# Altium PCB nRF2460.PcbDoc
Units mil, origin at the board's own origin, x right, y up, seen from the top; angles counter-clockwise.
Board outline 583 x 792 mil, 2 copper layers (Top Layer, Bottom Layer); 21 components, 23 nets, 78 pads, 49 vias.
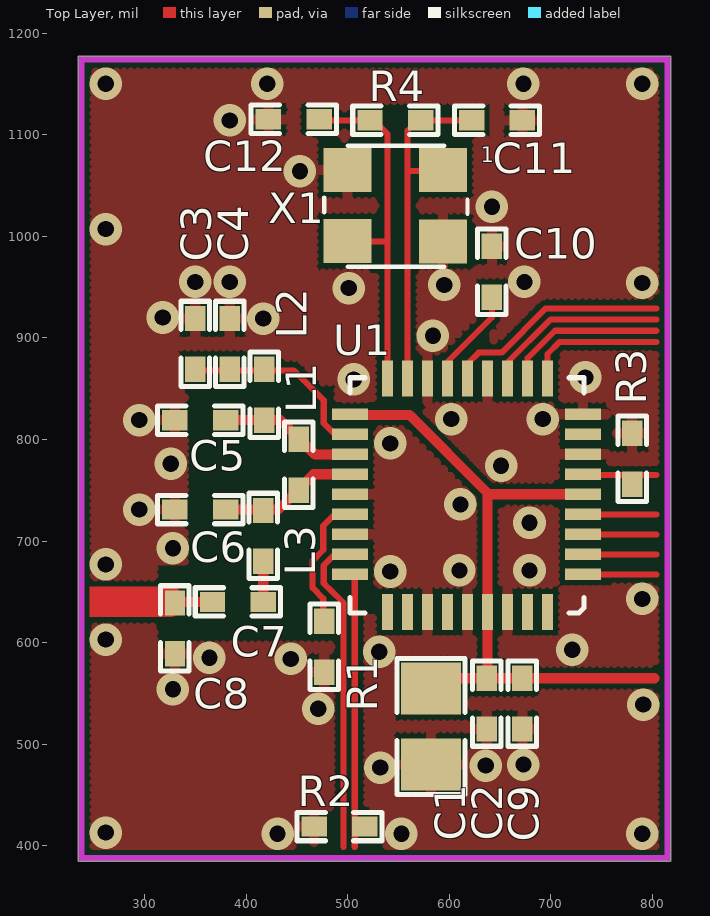
[diagram p0: Top Layer view]
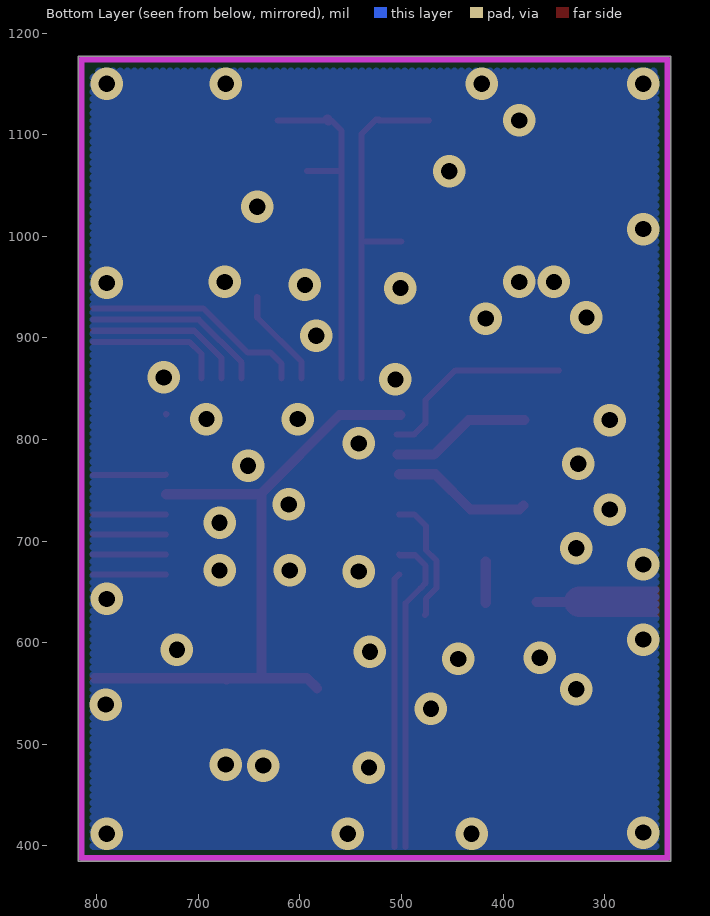
[diagram p1: Bottom Layer view, seen from below]

## Layer stack, top to bottom
Top Layer: signal copper 1.4
Dielectric: dielectric 12.6, FR-4, Dk 4.8
Bottom Layer: signal copper 1.4

## Board outline
818,1177 818,385 235,385 235,1177

## Design rules (kind name [scope] priority, off if disabled: settings)
Clearance [All] p1: gap=5
ComponentClearance [All] p1 off: gap=10 collisioncheckmode=3 verticalgap=10 showdistances=FALSE
FabricationTestPointUsage TestPointUsage [All] p1: valid=0 allowmultiple=FALSE
FabricationTestpoint Testpoint [All] p1: side=3 testpointundercomponent=TRUE minsize=40 maxsize=100 preferedsize=60 minholesize=0 maxholesize=40 preferedholesize=32 testpointgrid=1 allowsidetop=TRUE allowsidebottom=TRUE usegrid=TRUE gridtolerance=0.01
Height [All] p1 off: minheight=0 maxheight=1000 prefheight=500
HoleSize [All] p1: absolutevalues=TRUE maxlimit=200 minlimit=1 maxpercent=80.000 minpercent=20.000
PolygonConnect PolygonConnect_1 [isVia and innet(gnd)] p1: connectstyle=Direct reliefconductorwidth=10 reliefentries=4 polygonreliefangle="90 Angle"
PolygonConnect [All] p2: connectstyle=Relief reliefconductorwidth=10 reliefentries=4 polygonreliefangle="90 Angle"
RoutingVias [All] p1: holewidth=16 width=32 viastyle="Through Hole" minholewidth=10 minwidth=10 maxholewidth=28 maxwidth=50
SilkscreenOverComponentPads [All] p1: minsilkscreentomaskgap=10
SolderMaskExpansion [All] p1: expansion=4
Width [All] p1: maxlimit=100 minlimit=1 preferedwidth=6 minimp=50.000000 maximp=50.000000 favimp=50.000000
22 further rules are at their usual default settings.

## Components (designator, comment, footprint, x,y, rotation, side; value= is the part's Value field where it differs from the comment)
C1 "4.7µF" 0805 582,555 r270 top
C2 "1.0nF" 0402s 637,565 r270 top
C3 "2.2nF" 0402s 350,919 r270 top
C4 "N.C." 0402s 384,919 r270 top
C5 "1.2pF" 0402s 330,819 r0 top
C6 "1.2pF" 0402s 380,731 r180 top
C7 "1.5pF" 0402s 367,640 r0 top
C8 "1.2pF" 0402s 330,589 r90 top
C9 "10nF" 0402s 672,565 r270 top
C10 "33nF" 0402s 642,990 r270 top
C11 "15pF" 0402s 672,1114 r180 top
C12 "15pF" 0402s 422,1115 r0 top
L1 "4.7nH" 0402s 452,750 r90 top
L2 "8.2nH" 0402s 418,819 r90 top
L3 "5.6nH" 0402s 417,730 r270 top
R1 "22k" 0402s 477,571 r90 top
R2 "22k" 0402s 517,419 r180 top
R3 "22k" 0402s 780,756 r90 top
R4 "1M0" 0402s 522,1114 r0 top
U1 "nRF2460" Nordic_QFN36 617,745 r180 top
X1 "16MHz" BT-XTAL_3225 547,1030 r180 top

## Footprints (in the part's own frame and the unit in brackets; to place one, negate y for a bottom-side part, rotate by r counter-clockwise, add the part's x,y. Pads: shape width x height; smd on the part's side, far side on the other; paste and mask are expansions set on the pad)
0402s [mil] "SMD 0402s footprint"
  rect 25x20 smd: 1(0,0) 2(50,0)
  silkscreen extent -17,-14 67,14
0805 [mm] "SMD 0805 footprint"
  rect 1.3x1.5 smd: 1(0,0) 2(1.9,0)
  silkscreen extent -0.75,-0.85 2.65,0.85
BT-XTAL_3225 [mm] "Mercury X32 series"
  rect 1.2x1.1 smd: 1(-1.194,-0.89) 2(1.194,-0.89) 3(1.194,0.888) 4(-1.194,0.891)
  silkscreen extent -1.8,-1.5 1.78,1.52
Nordic_QFN36 [mm]
  rect 0.9x0.28 smd: 1(-2.916,1.975) 2(-2.916,1.475) 3(-2.916,0.975) 4(-2.916,0.475) 5(-2.916,-0.025) 6(-2.916,-0.525) 7(-2.916,-1.025) 8(-2.916,-1.525) 9(-2.916,-2.025) 19(2.916,-2.025) 20(2.916,-1.525) 21(2.916,-1.025) 22(2.916,-0.525) 23(2.916,-0.025) 24(2.916,0.475) 25(2.916,0.975) 26(2.916,1.475) 27(2.916,1.975)
  rect 0.28x0.9 smd: 10(-2.025,-2.916) 11(-1.525,-2.916) 12(-1.025,-2.916) 13(-0.525,-2.916) 14(-0.025,-2.916) 15(0.475,-2.916) 16(0.975,-2.916) 17(1.475,-2.916) 18(1.975,-2.916) 28(1.975,2.916) 29(1.475,2.916) 30(0.975,2.916) 31(0.475,2.916) 32(-0.025,2.916) 33(-0.525,2.916) 34(-1.025,2.916) 35(-1.525,2.916) 36(-2.025,2.916)
  silkscreen extent -2.94,-2.94 2.91,2.94

## Part data
C1: library part C0805-4µ7, "Chip Cap 0805"
C2: library part C0402-1n0, "Chip Cap 0402"
C3: library part C0402-2n2, "Chip Cap 0402"
C4: library part C0402-N.C., "Chip Cap 0402"
C5 C6 C8: library part C0402-1.2p, "Chip Cap 0402"
C7: library part C0402-1.5p, "Chip Cap 0402"
C9: library part C0402-10n, "Chip Cap 0402"
C10: library part C0402-33n, "Chip Cap 0402"
C11 C12: library part C0402-15p, "Chip Cap 0402"
L1: library part L0402-4n7, "Chip Ind 0402"
L2: library part L0402-8n2, "Chip Ind 0402"
L3: library part L0402-5n6, "Chip Ind 0402"
R1 R2 R3: library part R0402-22k, "Chip Res 0402"
R4: library part R0402-1M0, "Chip Res 0402"
U1: "2.4GHz Single Chip Wireless Audio Streamer"
X1: library part "XTAL SMD 16MHz (3225)", "XTAL SMD 16MHz, 9pF, Mercury"

## Via types
v1: diameter 32, hole 16, Top Layer to Bottom Layer, tented both sides, 49 vias

## Nets (pads, with @x,y where several pads share a name; then routed paths per layer and width w, separated by ;. In a path a pad name is that pad's centre, name@x,y a point inside that pad or via, vN(x,y) a via of type N, cw(c..) or ccw(c..) an arc to the next point about the centre after c; other vN are vias at no path point)
GND: C1.2 C2.2 C3.1 C4.1 C5.1 C6.2 C8.1 C9.2 C10.1 C11.1 C12.1 R1.1 R2.2 R3.2 U1.7 U1.9 U1.13 U1.16 U1.23 U1.25 U1.30 U1.32 U1.34 X1.2 X1.4 | length 0.4
  Top Layer w6: U1.9@731.54,825 U1.9
  other v1: 431,412 553,412 790,412 262,413 532,477 636,479 673,480 471,535 791,539 328,554 444,584 364,585 531,591 721,593 262,603 790,643 542,670 610,671 679,671 262,677 328,693 679,718 295,731 611,736 651,774 326,776 542,796 295,819 602,820 692,820 506,859 734,861 584,902 417,919 318,920 501,949 595,952 790,954 350,955 384,955 674,955 262,1007 642,1029 453,1064 384,1114 262,1150 421,1150 673,1150 790,1150
NetC3_2: C3.2 C4.2 L2.2 U1.20 | length 199.4
  Top Layer w6: C3.2@345,868 447,868 476.47,838.53 476.47,815.9 487.37,805 U1.20@505,805
NetC5_2: C5.2 L1.2 L2.1 U1.21 | length 139.1
  Top Layer w10: C5.2@379,819 C5.2 L2.1 434,819 468,785 U1.21@504,785
NetC6_1: C6.1 L1.1 L3.1 U1.22 | length 138.2
  Top Layer w10: C6.1@380,735 384,731 432,731 466.67,765.67 U1.22
NetC7_1: C7.1 C8.2 | length 99
  Top Layer w10: C8.2@330,640 C7.1
  Top Layer w30: 263,640 C8.2@325,640
NetC7_2: C7.2 L3.2 | length 41
  Top Layer w10: C7.2@417,639 C7.2 L3.2
NetC10_2: C10.2 U1.15 | length 98.3
  Top Layer w6: U1.15 598.3,876.3 642,920 C10.2
NetC11_2: C11.2 R4.2 U1.17 X1.1 | length 346.8
  Top Layer w6: U1.17 558.93,1064 ; X1.1@593,1064 558.93,1064 ; C11.2 R4.2 569,1114 558.93,1103.93 558.93,1064
  Top Layer w10: R4.2 R4.2@573,1115
NetC12_2: C12.2 R4.1 U1.18 X1.3 | length 352.3
  Top Layer w6: C12.2@473,1114 R4.1 ; X1.3@500,995 539.24,995 ; R4.1@522,1115 525,1115 539.24,1100.76 539.24,995 ; U1.18 539.24,995
NetR1_2: R1.2 U1.24 | length 128
  Top Layer w6: R1.2@477,627 476,628 476,643.33 465.47,653.86 465.47,680.62 476,691.15 476,714.97 487.33,726.3 U1.24
NetR2_1: R2.1 U1.27 | length 270.2
  Top Layer w6: U1.27 507,662.43 507,399
NetR3_1: R3.1 U1.6 | length 72.3
  Top Layer w6: U1.6 732.48,765 803.79,765
NetU1_1: U1.1 | length 72
  Top Layer w6: U1.1 803.79,667.24
NetU1_2: U1.2 | length 72
  Top Layer w6: U1.2 803.86,686.93
NetU1_3: U1.3 | length 72
  Top Layer w6: U1.3 803.79,706.61
NetU1_4: U1.4 | length 72
  Top Layer w6: U1.4 803.79,726.3
NetU1_10: U1.10 | length 136.3
  Top Layer w6: U1.10 696.72,884.06 708.67,896 803.79,896
NetU1_11: U1.11 | length 158.1
  Top Layer w6: U1.11 677.04,879.93 704.11,907 803.79,907
NetU1_12: U1.12 | length 179.9
  Top Layer w6: U1.12 657.35,875.8 699.56,918 803.79,918
NetU1_14: U1.14 | length 223.2
  Top Layer w6: U1.14 617.98,874.67 628.84,885.53 651.53,885.53 695,929 803.79,929
NetU1_26: U1.26 | length 315.4
  Top Layer w6: 496,399 496,639 481.27,653.73 481.16,653.73 476.47,658.42 476.47,676.07 486.4,686 501.26,686 U1.26
NetU1_36: U1.36
VTG': C1.1 C2.1 C9.1 U1.5 U1.19 U1.33 | length 668.5
  Top Layer w10: U1.19@501,824 561,824 637.67,747.33 U1.33 C2.1@637.67,564.67 ; C1.1@583,555 593,565 C2.1 C9.1 ; 638.02,745.98 U1.5 ; C9.1@672,564 673,565 802,565
pads on no net: U1.8 U1.28 U1.29 U1.31 U1.35

## Polygon pours and split planes (outlines as drawn)
GND on Bottom Layer "Bottom Layer-No Net" (hatched 90Degree grid 7 track 8, remove dead copper, pour order 1001): 222.4,1206 222.4,378.75 220,375 223,379.69 803,379.69 803,1168.04 790.7,1187.25
GND on Top Layer "Bottom Layer-No Net" (hatched 90Degree grid 7 track 8, remove dead copper, pour order 1000): 223.4,1210 223.4,370.8 221,367 224.01,371.75 805,371.75 805,1171.49 792.68,1190.98

## Keep-outs
Keep-Out Layer:
  lines w6: 238,388 238,1174 815,1174 815,388 238,388

## Other copper
Top Layer:
  rectangle net NetC7_1: 246,625 297,655
  pour cut-out: 492,657 529,657 529,628 492,628
  pour cut-out: 501,1133 598,1133 598,1094 501,1094
  pour cut-out: 340,680 340,856 490,856 490,598 310,598 310,680

## Silkscreen, mask and mechanical layers (free items; w line width, h text height)
Mechanical 1:
  lines w6: 238,388 815,388 815,1174 238,1174 238,388

## Text inside footprints (layer, text, board x,y; h text height)
X1: Top Overlay "1" at 631,1073 h15